# Altium PCB Ender-3.PcbDoc (part 8 of 14)
Units mil, origin at the board's own origin, x right, y up, seen from the top; angles counter-clockwise.
Board outline 3970.48 x 2769.68 mil, 2 copper layers (TopLayer, BottomLayer); 146 components, 136 nets, 669 pads, 614 vias.
Unrouted connection lines stored in the file: 1.
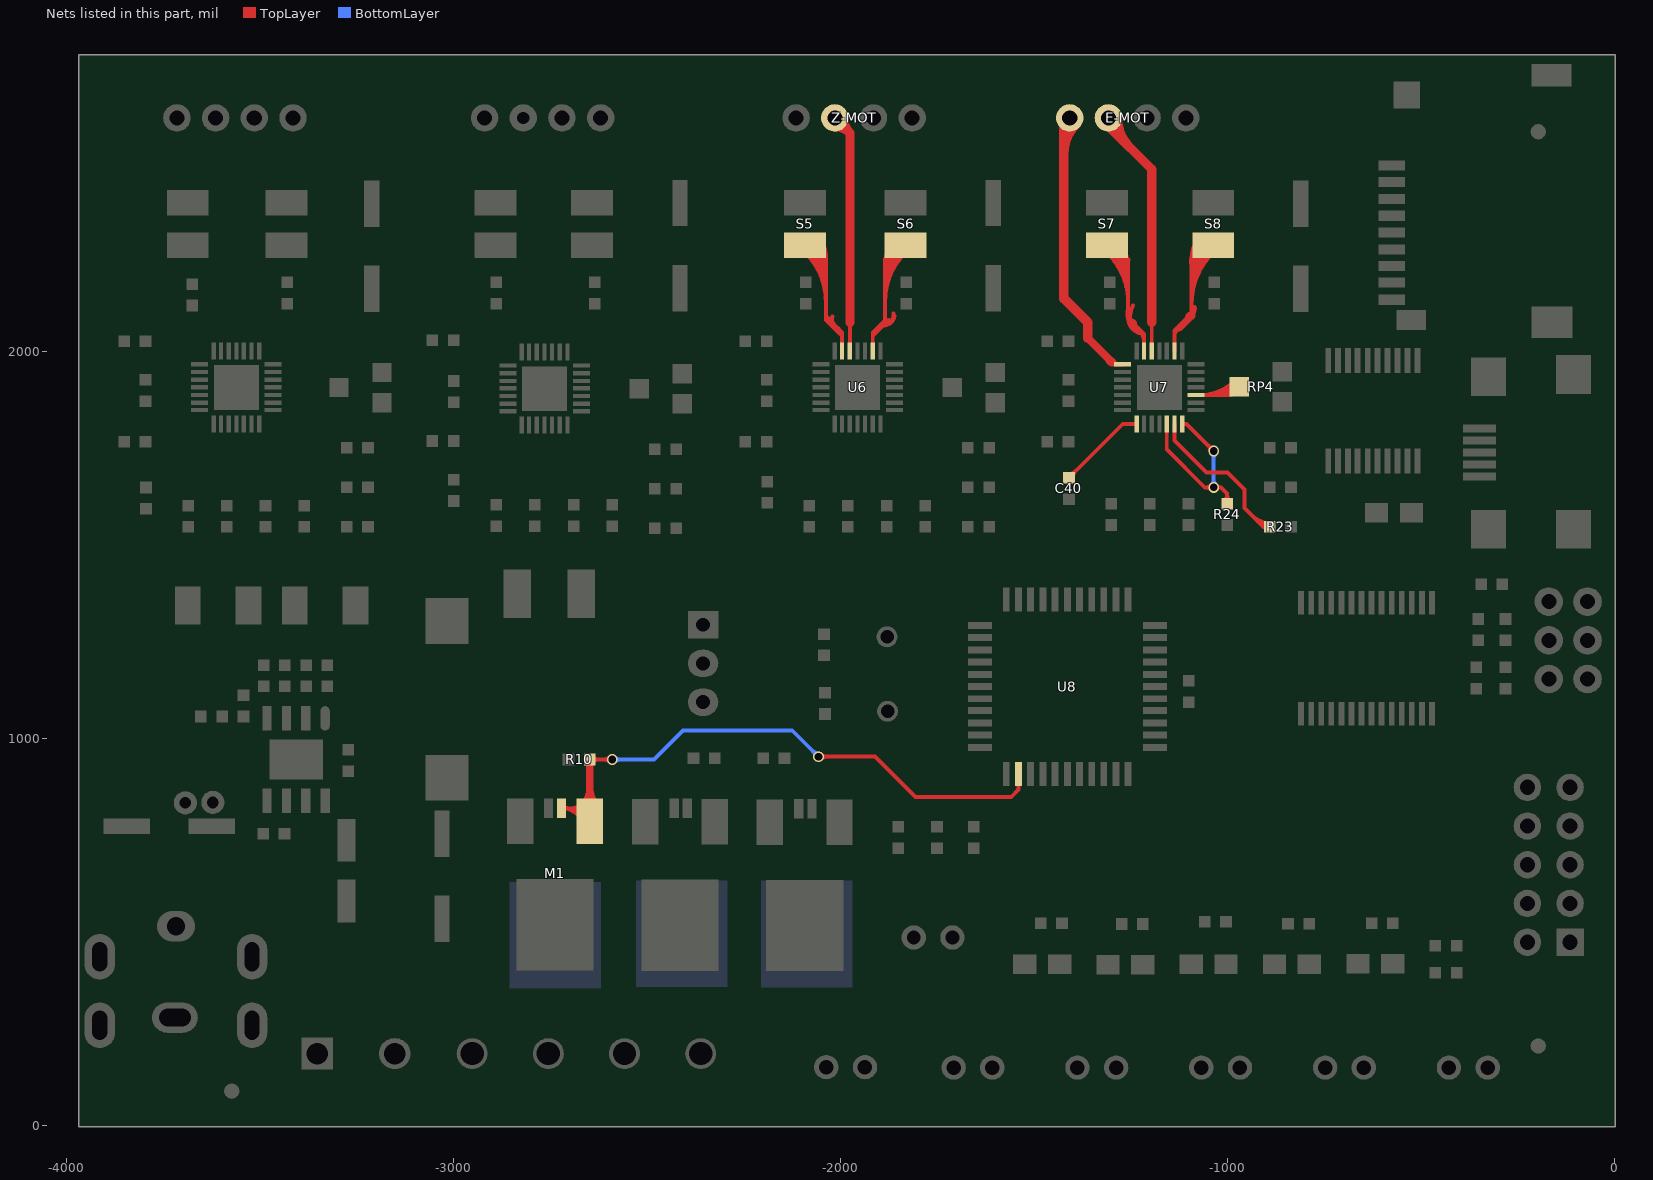
[diagram p8: the nets of this part, all layers, seen from the top]

## Via types
v1: diameter 28, hole 18, TopLayer to BottomLayer, tented both sides, 246 vias
v2: diameter 27.56, hole 19.68, TopLayer to BottomLayer, tented both sides, 196 vias
v3: diameter 20, hole 12, TopLayer to BottomLayer, tented both sides, 124 vias
v4: diameter 27.56, hole 11.81, TopLayer to BottomLayer, tented bottom, 16 vias
v5: diameter 27.56, hole 19.68, TopLayer to BottomLayer, 16 vias
v6: diameter 20, hole 12, TopLayer to BottomLayer, 12 vias
v7: diameter 28, hole 11.81, TopLayer to BottomLayer, tented both sides, 4 vias

## Nets (pads, with @x,y where several pads share a name; then routed paths per layer and width w, separated by ;. In a path a pad name is that pad's centre, name@x,y a point inside that pad or via, vN(x,y) a via of type N, cw(c..) or ccw(c..) an arc to the next point about the centre after c; other vN are vias at no path point) (continued)
NetU6_23: S6.1 U6.23 | length 5462.5
  TopLayer w10: U6.23@-1916.62,2002.88 -1916.62,2048.76 -1884.54,2080.84 -1884.54,2240.84 -1849.54,2275.84 S6.1@-1831.54,2275.84 ; -1913.54,2044.84 -1875.54,2082.84 ; -1896.41,2068.97 ccw(c-1889.91,2099.34) -1859.54,2092.84 ; -1889.47,2068.91 ccw(c-1891.47,2097.84) -1862.54,2099.84 ; -1884.54,2130.99 cw(c-1707.68,2130.99) S6.1@-1832.74,2256.04 ; -1884.54,2130.99 cw(c-1707.68,2130.99) S6.1@-1832.74,2256.04 ; -1884.54,2130.99 cw(c-1707.68,2130.99) S6.1@-1832.74,2256.04 ; -1884.54,2130.99 cw(c-1707.68,2130.99) S6.1@-1832.74,2256.04 ; -1884.54,2130.99 cw(c-1707.68,2130.99) S6.1@-1832.74,2256.04 ; -1884.54,2130.99 cw(c-1707.68,2130.99) S6.1@-1832.74,2256.04 ; -1884.54,2130.99 cw(c-1707.68,2130.99) S6.1@-1832.74,2256.04 ; -1884.54,2130.99 cw(c-1707.68,2130.99) S6.1@-1832.74,2256.04 ; -1884.54,2130.99 cw(c-1707.68,2130.99) S6.1@-1832.74,2256.04 ; -1884.54,2155.13 cw(c-1731.82,2155.13) S6.1@-1839.81,2263.11 ; -1884.54,2155.13 cw(c-1731.82,2155.13) S6.1@-1839.81,2263.11 ; -1884.54,2155.13 cw(c-1731.82,2155.13) S6.1@-1839.81,2263.11 ; -1884.54,2155.13 cw(c-1731.82,2155.13) S6.1@-1839.81,2263.11 ; -1884.54,2155.13 cw(c-1731.82,2155.13) S6.1@-1839.81,2263.11 ; -1884.54,2155.13 cw(c-1731.82,2155.13) S6.1@-1839.81,2263.11 ; -1884.54,2155.13 cw(c-1731.82,2155.13) S6.1@-1839.81,2263.11 ; -1884.54,2155.13 cw(c-1731.82,2155.13) S6.1@-1839.81,2263.11 ; -1884.54,2155.13 cw(c-1731.82,2155.13) S6.1@-1839.81,2263.11 ; -1884.54,2179.27 cw(c-1755.97,2179.27) S6.1@-1846.88,2270.19 ; -1884.54,2179.27 cw(c-1755.97,2179.27) S6.1@-1846.88,2270.19 ; -1884.54,2179.27 cw(c-1755.97,2179.27) S6.1@-1846.88,2270.19 ; -1884.54,2179.27 cw(c-1755.97,2179.27) S6.1@-1846.88,2270.19 ; -1884.54,2179.27 cw(c-1755.97,2179.27) S6.1@-1846.88,2270.19 ; -1884.54,2179.27 cw(c-1755.97,2179.27) S6.1@-1846.88,2270.19 ; -1884.54,2179.27 cw(c-1755.97,2179.27) S6.1@-1846.88,2270.19 ; -1884.54,2179.27 cw(c-1755.97,2179.27) S6.1@-1846.88,2270.19 ; -1884.54,2179.27 cw(c-1755.97,2179.27) S6.1@-1846.88,2270.19 ; -1884.54,2203.42 cw(c-1780.11,2203.42) S6.1@-1853.95,2277.26 ; -1884.54,2203.42 cw(c-1780.11,2203.42) S6.1@-1853.95,2277.26 ; -1884.54,2203.42 cw(c-1780.11,2203.42) S6.1@-1853.95,2277.26 ; -1884.54,2203.42 cw(c-1780.11,2203.42) S6.1@-1853.95,2277.26 ; -1884.54,2203.42 cw(c-1780.11,2203.42) S6.1@-1853.95,2277.26 ; -1884.54,2203.42 cw(c-1780.11,2203.42) S6.1@-1853.95,2277.26 ; -1884.54,2203.42 cw(c-1780.11,2203.42) S6.1@-1853.95,2277.26 ; -1884.54,2203.42 cw(c-1780.11,2203.42) S6.1@-1853.95,2277.26 ; -1884.54,2203.42 cw(c-1780.11,2203.42) S6.1@-1853.95,2277.26 ; -1884.54,2227.56 cw(c-1804.25,2227.56) S6.1@-1861.02,2284.33 ; -1884.54,2227.56 cw(c-1804.25,2227.56) S6.1@-1861.02,2284.33 ; -1884.54,2227.56 cw(c-1804.25,2227.56) S6.1@-1861.02,2284.33 ; -1884.54,2227.56 cw(c-1804.25,2227.56) S6.1@-1861.02,2284.33 ; -1884.54,2227.56 cw(c-1804.25,2227.56) S6.1@-1861.02,2284.33 ; -1884.54,2227.56 cw(c-1804.25,2227.56) S6.1@-1861.02,2284.33 ; -1884.54,2227.56 cw(c-1804.25,2227.56) S6.1@-1861.02,2284.33 ; -1884.54,2227.56 cw(c-1804.25,2227.56) S6.1@-1861.02,2284.33 ; -1884.54,2227.56 cw(c-1804.25,2227.56) S6.1@-1861.02,2284.33 ; -1883.03,2242.34 cw(c-1865.71,2225.02) S6.1@-1859.56,2248.74 ; -1883.03,2242.34 ccw(c-1897.92,2257.23) S6.1@-1878.44,2265.22 ; -1883.03,2242.34 cw(c-1865.71,2225.02) S6.1@-1859.56,2248.74 ; -1883.03,2242.34 ccw(c-1897.92,2257.23) S6.1@-1878.44,2265.22 ; -1883.03,2242.34 cw(c-1865.71,2225.02) S6.1@-1859.56,2248.74 ; -1883.03,2242.34 ccw(c-1897.92,2257.23) S6.1@-1878.44,2265.22 ; -1883.03,2242.34 cw(c-1865.71,2225.02) S6.1@-1859.56,2248.74 ; -1883.03,2242.34 ccw(c-1897.92,2257.23) S6.1@-1878.44,2265.22 ; -1883.03,2242.34 cw(c-1865.71,2225.02) S6.1@-1859.56,2248.74 ; -1883.03,2242.34 ccw(c-1897.92,2257.23) S6.1@-1878.44,2265.22 ; -1883.03,2242.34 ccw(c-1897.92,2257.23) S6.1@-1878.44,2265.22 ; -1883.03,2242.34 cw(c-1865.71,2225.02) S6.1@-1859.56,2248.74 ; -1883.03,2242.34 ccw(c-1897.92,2257.23) S6.1@-1878.44,2265.22 ; -1883.03,2242.34 cw(c-1865.71,2225.02) S6.1@-1859.56,2248.74 ; -1883.03,2242.34 ccw(c-1897.92,2257.23) S6.1@-1878.44,2265.22 ; -1883.03,2242.34 cw(c-1865.71,2225.02) S6.1@-1859.56,2248.74 ; -1883.03,2242.34 ccw(c-1897.92,2257.23) S6.1@-1878.44,2265.22 ; -1883.03,2242.34 cw(c-1865.71,2225.02) S6.1@-1859.56,2248.74
NetU6_26: U6.26 Z-MOT.2 | length 1112
  TopLayer w10: U6.26@-1975.62,2017.79 -1975.62,2075.84
  TopLayer w23.62: Z-MOT.2@-2014.54,2604.84 -1975.62,2565.93 ; -1975.62,2075.84 -1975.62,2565.93 ; Z-MOT.2@-2013.93,2581.23 cw(c-2012.59,2528.96) -1975.62,2565.93 ; Z-MOT.2@-2013.93,2581.23 cw(c-2012.59,2528.96) -1975.62,2565.93 ; Z-MOT.2@-2013.93,2581.23 cw(c-2012.59,2528.96) -1975.62,2565.93 ; Z-MOT.2@-2013.93,2581.23 cw(c-2012.59,2528.96) -1975.62,2565.93 ; Z-MOT.2@-2013.93,2581.23 cw(c-2012.59,2528.96) -1975.62,2565.93 ; Z-MOT.2@-2013.93,2581.23 cw(c-2012.59,2528.96) -1975.62,2565.93 ; Z-MOT.2@-1990.92,2604.24 ccw(c-1938.65,2602.9) -1975.62,2565.93 ; Z-MOT.2@-1990.92,2604.24 ccw(c-1938.65,2602.9) -1975.62,2565.93 ; Z-MOT.2@-1990.92,2604.24 ccw(c-1938.65,2602.9) -1975.62,2565.93 ; Z-MOT.2@-1990.92,2604.24 ccw(c-1938.65,2602.9) -1975.62,2565.93 ; Z-MOT.2@-1990.92,2604.24 ccw(c-1938.65,2602.9) -1975.62,2565.93 ; Z-MOT.2@-1990.92,2604.24 ccw(c-1938.65,2602.9) -1975.62,2565.93
NetU6_27: S5.1 U6.27 | length 5522.6
  TopLayer w10: S5.1@-2091.54,2275.84 -2068.54,2275.84 -2037.54,2244.84 -2037.54,2082.84 -2002.54,2047.84 cw(c-2003.58,2039.89) -1995.62,2038.84 ; -2037.54,2092.84 -1995.62,2050.93 U6.27@-1995.62,2002.88 ; -2020.54,2091.84 ccw(c-1997.24,2083.84) -2005.24,2060.55 ; S5.1@-2090.33,2256.04 cw(c-2217.8,2128.58) -2037.54,2128.58 ; S5.1@-2090.33,2256.04 cw(c-2217.8,2128.58) -2037.54,2128.58 ; S5.1@-2090.33,2256.04 cw(c-2217.8,2128.58) -2037.54,2128.58 ; S5.1@-2090.33,2256.04 cw(c-2217.8,2128.58) -2037.54,2128.58 ; S5.1@-2090.33,2256.04 cw(c-2217.8,2128.58) -2037.54,2128.58 ; S5.1@-2090.33,2256.04 cw(c-2217.8,2128.58) -2037.54,2128.58 ; S5.1@-2090.33,2256.04 cw(c-2217.8,2128.58) -2037.54,2128.58 ; S5.1@-2090.33,2256.04 cw(c-2217.8,2128.58) -2037.54,2128.58 ; S5.1@-2090.33,2256.04 cw(c-2217.8,2128.58) -2037.54,2128.58 ; S5.1@-2083.26,2263.11 cw(c-2193.66,2152.72) -2037.54,2152.72 ; S5.1@-2083.26,2263.11 cw(c-2193.66,2152.72) -2037.54,2152.72 ; S5.1@-2083.26,2263.11 cw(c-2193.66,2152.72) -2037.54,2152.72 ; S5.1@-2083.26,2263.11 cw(c-2193.66,2152.72) -2037.54,2152.72 ; S5.1@-2083.26,2263.11 cw(c-2193.66,2152.72) -2037.54,2152.72 ; S5.1@-2083.26,2263.11 cw(c-2193.66,2152.72) -2037.54,2152.72 ; S5.1@-2083.26,2263.11 cw(c-2193.66,2152.72) -2037.54,2152.72 ; S5.1@-2083.26,2263.11 cw(c-2193.66,2152.72) -2037.54,2152.72 ; S5.1@-2083.26,2263.11 cw(c-2193.66,2152.72) -2037.54,2152.72 ; S5.1@-2076.19,2270.19 cw(c-2169.52,2176.86) -2037.54,2176.86 ; S5.1@-2076.19,2270.19 cw(c-2169.52,2176.86) -2037.54,2176.86 ; S5.1@-2076.19,2270.19 cw(c-2169.52,2176.86) -2037.54,2176.86 ; S5.1@-2076.19,2270.19 cw(c-2169.52,2176.86) -2037.54,2176.86 ; S5.1@-2076.19,2270.19 cw(c-2169.52,2176.86) -2037.54,2176.86 ; S5.1@-2076.19,2270.19 cw(c-2169.52,2176.86) -2037.54,2176.86 ; S5.1@-2076.19,2270.19 cw(c-2169.52,2176.86) -2037.54,2176.86 ; S5.1@-2076.19,2270.19 cw(c-2169.52,2176.86) -2037.54,2176.86 ; S5.1@-2076.19,2270.19 cw(c-2169.52,2176.86) -2037.54,2176.86 ; S5.1@-2069.12,2277.26 cw(c-2145.38,2201) -2037.54,2201 ; S5.1@-2069.12,2277.26 cw(c-2145.38,2201) -2037.54,2201 ; S5.1@-2069.12,2277.26 cw(c-2145.38,2201) -2037.54,2201 ; S5.1@-2069.12,2277.26 cw(c-2145.38,2201) -2037.54,2201 ; S5.1@-2069.12,2277.26 cw(c-2145.38,2201) -2037.54,2201 ; S5.1@-2069.12,2277.26 cw(c-2145.38,2201) -2037.54,2201 ; S5.1@-2069.12,2277.26 cw(c-2145.38,2201) -2037.54,2201 ; S5.1@-2069.12,2277.26 cw(c-2145.38,2201) -2037.54,2201 ; S5.1@-2069.12,2277.26 cw(c-2145.38,2201) -2037.54,2201 ; S5.1@-2062.05,2284.33 cw(c-2121.23,2225.14) -2037.54,2225.14 ; S5.1@-2062.05,2284.33 cw(c-2121.23,2225.14) -2037.54,2225.14 ; S5.1@-2062.05,2284.33 cw(c-2121.23,2225.14) -2037.54,2225.14 ; S5.1@-2062.05,2284.33 cw(c-2121.23,2225.14) -2037.54,2225.14 ; S5.1@-2062.05,2284.33 cw(c-2121.23,2225.14) -2037.54,2225.14 ; S5.1@-2062.05,2284.33 cw(c-2121.23,2225.14) -2037.54,2225.14 ; S5.1@-2062.05,2284.33 cw(c-2121.23,2225.14) -2037.54,2225.14 ; S5.1@-2062.05,2284.33 cw(c-2121.23,2225.14) -2037.54,2225.14 ; S5.1@-2062.05,2284.33 cw(c-2121.23,2225.14) -2037.54,2225.14 ; S5.1@-2054.98,2291.4 cw(c-2097.09,2249.29) -2037.54,2249.29 ; S5.1@-2054.98,2291.4 cw(c-2097.09,2249.29) -2037.54,2249.29 ; S5.1@-2054.98,2291.4 cw(c-2097.09,2249.29) -2037.54,2249.29 ; S5.1@-2054.98,2291.4 cw(c-2097.09,2249.29) -2037.54,2249.29 ; S5.1@-2054.98,2291.4 cw(c-2097.09,2249.29) -2037.54,2249.29 ; S5.1@-2054.98,2291.4 cw(c-2097.09,2249.29) -2037.54,2249.29 ; S5.1@-2054.98,2291.4 cw(c-2097.09,2249.29) -2037.54,2249.29 ; S5.1@-2054.98,2291.4 cw(c-2097.09,2249.29) -2037.54,2249.29 ; S5.1@-2054.98,2291.4 cw(c-2097.09,2249.29) -2037.54,2249.29
NetU7_1: E-MOT.1 U7.1 | length 1180.2
  TopLayer w10: E-MOT.1@-1422.54,2589.8 E-MOT.1@-1407.49,2604.84 ; -1310.54,1983.84 ccw(c-1297.05,1981.36) -1299.54,1967.88 U7.1@-1270.62,1967.88 ; -1309.11,1984.42 cw(c-1308.1,1966.86) U7.1@-1290.54,1967.88
  TopLayer w20: -1360.54,2035.84 -1302.54,1977.84
  TopLayer w25: E-MOT.1@-1422.54,2589.8 -1422.54,2440.84 -1422.54,2137.8 -1360.54,2075.8 -1360.54,2035.84 ; -1422.54,2513.15 cw(c-1315.8,2513.15) E-MOT.1@-1391.27,2588.63 ; -1422.54,2513.15 cw(c-1315.8,2513.15) E-MOT.1@-1391.27,2588.63 ; -1422.54,2513.15 cw(c-1315.8,2513.15) E-MOT.1@-1391.27,2588.63 ; -1422.54,2513.15 cw(c-1315.8,2513.15) E-MOT.1@-1391.27,2588.63 ; -1422.54,2513.15 cw(c-1315.8,2513.15) E-MOT.1@-1391.27,2588.63
NetU7_8: C40.1 U7.8 | length 572.2
  TopLayer w10: C40.1@-1409.45,1674.8 -1270.37,1813.88 U7.8@-1236.12,1813.88 ; C40.1@-1409.45,1684.8 ccw(c-1409.45,1708.95) -1392.38,1691.87 ; C40.1@-1409.45,1684.8 ccw(c-1409.45,1708.95) -1392.38,1691.87 ; C40.1@-1409.45,1684.8 ccw(c-1409.45,1708.95) -1392.38,1691.87 ; C40.1@-1409.45,1684.8 ccw(c-1409.45,1708.95) -1392.38,1691.87 ; C40.1@-1409.45,1684.8 ccw(c-1409.45,1708.95) -1392.38,1691.87 ; C40.1@-1409.45,1684.8 ccw(c-1409.45,1708.95) -1392.38,1691.87 ; C40.1@-1409.45,1684.8 ccw(c-1409.45,1708.95) -1392.38,1691.87 ; C40.1@-1409.45,1684.8 ccw(c-1409.45,1708.95) -1392.38,1691.87 ; C40.1@-1409.45,1684.8 ccw(c-1409.45,1708.95) -1392.38,1691.87 ; C40.1@-1399.45,1674.8 cw(c-1375.31,1674.8) -1392.38,1691.87 ; C40.1@-1399.45,1674.8 cw(c-1375.31,1674.8) -1392.38,1691.87 ; C40.1@-1399.45,1674.8 cw(c-1375.31,1674.8) -1392.38,1691.87 ; C40.1@-1399.45,1674.8 cw(c-1375.31,1674.8) -1392.38,1691.87 ; C40.1@-1399.45,1674.8 cw(c-1375.31,1674.8) -1392.38,1691.87 ; C40.1@-1399.45,1674.8 cw(c-1375.31,1674.8) -1392.38,1691.87 ; C40.1@-1399.45,1674.8 cw(c-1375.31,1674.8) -1392.38,1691.87 ; C40.1@-1399.45,1674.8 cw(c-1375.31,1674.8) -1392.38,1691.87 ; C40.1@-1399.45,1674.8 cw(c-1375.31,1674.8) -1392.38,1691.87
NetU7_12: R24.1 U7.12 U7.14 | length 2290.6
  TopLayer w10: U7.12@-1156.62,1813.88 -1156.62,1747.93 -1058.54,1649.84 -1016.54,1649.84 ; U7.14@-1116.12,1813.88 -1105.57,1813.88 v2(-1035.54,1743.84) ; R24.1@-1000.62,1607.88 -1000.62,1633.93 -1016.54,1649.84 ; -1056.73,1649.84 cw(c-1056.73,1628.65) v2@-1041.74,1643.63 ; -1056.73,1649.84 ccw(c-1056.73,1671.04) v2@-1041.74,1656.05 ; -1056.73,1649.84 cw(c-1056.73,1628.65) v2@-1041.74,1643.63 ; -1056.73,1649.84 ccw(c-1056.73,1671.04) v2@-1041.74,1656.05 ; -1056.73,1649.84 cw(c-1056.73,1628.65) v2@-1041.74,1643.63 ; -1056.73,1649.84 ccw(c-1056.73,1671.04) v2@-1041.74,1656.05 ; -1056.73,1649.84 cw(c-1056.73,1628.65) v2@-1041.74,1643.63 ; -1056.73,1649.84 ccw(c-1056.73,1671.04) v2@-1041.74,1656.05 ; -1056.73,1649.84 cw(c-1056.73,1628.65) v2@-1041.74,1643.63 ; -1056.73,1649.84 ccw(c-1056.73,1671.04) v2@-1041.74,1656.05 ; -1056.73,1649.84 ccw(c-1056.73,1671.04) v2@-1041.74,1656.05 ; -1056.73,1649.84 cw(c-1056.73,1628.65) v2@-1041.74,1643.63 ; -1056.73,1649.84 ccw(c-1056.73,1671.04) v2@-1041.74,1656.05 ; -1056.73,1649.84 cw(c-1056.73,1628.65) v2@-1041.74,1643.63 ; -1056.73,1649.84 ccw(c-1056.73,1671.04) v2@-1041.74,1656.05 ; -1056.73,1649.84 cw(c-1056.73,1628.65) v2@-1041.74,1643.63 ; -1056.73,1649.84 ccw(c-1056.73,1671.04) v2@-1041.74,1656.05 ; -1056.73,1649.84 cw(c-1056.73,1628.65) v2@-1041.74,1643.63 ; -1050.52,1758.83 cw(c-1065.51,1743.84) v2@-1044.31,1743.84 ; -1050.52,1758.83 ccw(c-1035.54,1773.82) v2@-1035.54,1752.62 ; -1050.52,1758.83 cw(c-1065.51,1743.84) v2@-1044.31,1743.84 ; -1050.52,1758.83 ccw(c-1035.54,1773.82) v2@-1035.54,1752.62 ; -1050.52,1758.83 cw(c-1065.51,1743.84) v2@-1044.31,1743.84 ; -1050.52,1758.83 ccw(c-1035.54,1773.82) v2@-1035.54,1752.62 ; -1050.52,1758.83 cw(c-1065.51,1743.84) v2@-1044.31,1743.84 ; -1050.52,1758.83 ccw(c-1035.54,1773.82) v2@-1035.54,1752.62 ; -1050.52,1758.83 cw(c-1065.51,1743.84) v2@-1044.31,1743.84 ; -1050.52,1758.83 ccw(c-1035.54,1773.82) v2@-1035.54,1752.62 ; -1050.52,1758.83 ccw(c-1035.54,1773.82) v2@-1035.54,1752.62 ; -1050.52,1758.83 cw(c-1065.51,1743.84) v2@-1044.31,1743.84 ; -1050.52,1758.83 ccw(c-1035.54,1773.82) v2@-1035.54,1752.62 ; -1050.52,1758.83 cw(c-1065.51,1743.84) v2@-1044.31,1743.84 ; -1050.52,1758.83 ccw(c-1035.54,1773.82) v2@-1035.54,1752.62 ; -1050.52,1758.83 cw(c-1065.51,1743.84) v2@-1044.31,1743.84 ; -1050.52,1758.83 ccw(c-1035.54,1773.82) v2@-1035.54,1752.62 ; -1050.52,1758.83 cw(c-1065.51,1743.84) v2@-1044.31,1743.84 ; v2@-1028.85,1644.15 cw(c-1016.54,1633.68) -1016.54,1649.84 ; v2@-1028.85,1644.15 cw(c-1016.54,1633.68) -1016.54,1649.84 ; v2@-1028.85,1644.15 cw(c-1016.54,1633.68) -1016.54,1649.84 ; v2@-1028.85,1644.15 cw(c-1016.54,1633.68) -1016.54,1649.84 ; v2@-1028.85,1644.15 cw(c-1016.54,1633.68) -1016.54,1649.84 ; v2@-1028.85,1644.15 cw(c-1016.54,1633.68) -1016.54,1649.84 ; v2@-1028.85,1644.15 cw(c-1016.54,1633.68) -1016.54,1649.84 ; v2@-1028.85,1644.15 cw(c-1016.54,1633.68) -1016.54,1649.84 ; v2@-1028.85,1644.15 cw(c-1016.54,1633.68) -1016.54,1649.84 ; v2@-1028.85,1655.53 ccw(c-1016.54,1666.01) -1016.54,1649.84 ; v2@-1028.85,1655.53 ccw(c-1016.54,1666.01) -1016.54,1649.84 ; v2@-1028.85,1655.53 ccw(c-1016.54,1666.01) -1016.54,1649.84 ; v2@-1028.85,1655.53 ccw(c-1016.54,1666.01) -1016.54,1649.84 ; v2@-1028.85,1655.53 ccw(c-1016.54,1666.01) -1016.54,1649.84 ; v2@-1028.85,1655.53 ccw(c-1016.54,1666.01) -1016.54,1649.84 ; v2@-1028.85,1655.53 ccw(c-1016.54,1666.01) -1016.54,1649.84 ; v2@-1028.85,1655.53 ccw(c-1016.54,1666.01) -1016.54,1649.84 ; v2@-1028.85,1655.53 ccw(c-1016.54,1666.01) -1016.54,1649.84 ; R24.1@-1007.69,1614.95 ccw(c-1024.76,1632.02) -1000.62,1632.02 ; R24.1@-1007.69,1614.95 ccw(c-1024.76,1632.02) -1000.62,1632.02 ; R24.1@-1007.69,1614.95 ccw(c-1024.76,1632.02) -1000.62,1632.02 ; R24.1@-1007.69,1614.95 ccw(c-1024.76,1632.02) -1000.62,1632.02 ; R24.1@-1007.69,1614.95 ccw(c-1024.76,1632.02) -1000.62,1632.02 ; R24.1@-1007.69,1614.95 ccw(c-1024.76,1632.02) -1000.62,1632.02 ; R24.1@-1007.69,1614.95 ccw(c-1024.76,1632.02) -1000.62,1632.02 ; R24.1@-1007.69,1614.95 ccw(c-1024.76,1632.02) -1000.62,1632.02 ; R24.1@-1007.69,1614.95 ccw(c-1024.76,1632.02) -1000.62,1632.02 ; -1000.62,1632.02 ccw(c-976.48,1632.02) R24.1@-993.55,1614.95 ; -1000.62,1632.02 ccw(c-976.48,1632.02) R24.1@-993.55,1614.95 ; -1000.62,1632.02 ccw(c-976.48,1632.02) R24.1@-993.55,1614.95 ; -1000.62,1632.02 ccw(c-976.48,1632.02) R24.1@-993.55,1614.95 ; -1000.62,1632.02 ccw(c-976.48,1632.02) R24.1@-993.55,1614.95 ; -1000.62,1632.02 ccw(c-976.48,1632.02) R24.1@-993.55,1614.95 ; -1000.62,1632.02 ccw(c-976.48,1632.02) R24.1@-993.55,1614.95 ; -1000.62,1632.02 ccw(c-976.48,1632.02) R24.1@-993.55,1614.95 ; -1000.62,1632.02 ccw(c-976.48,1632.02) R24.1@-993.55,1614.95
  BottomLayer w10: v2(-1035.54,1649.84) v2(-1035.54,1743.84) ; v2@-1041.74,1656.05 ccw(c-1056.73,1671.04) -1035.54,1671.04 ; v2@-1041.74,1656.05 ccw(c-1056.73,1671.04) -1035.54,1671.04 ; v2@-1041.74,1656.05 ccw(c-1056.73,1671.04) -1035.54,1671.04 ; v2@-1041.74,1656.05 ccw(c-1056.73,1671.04) -1035.54,1671.04 ; v2@-1041.74,1656.05 ccw(c-1056.73,1671.04) -1035.54,1671.04 ; v2@-1041.74,1656.05 ccw(c-1056.73,1671.04) -1035.54,1671.04 ; v2@-1041.74,1656.05 ccw(c-1056.73,1671.04) -1035.54,1671.04 ; v2@-1041.74,1656.05 ccw(c-1056.73,1671.04) -1035.54,1671.04 ; v2@-1041.74,1656.05 ccw(c-1056.73,1671.04) -1035.54,1671.04 ; v2@-1041.74,1737.63 cw(c-1056.73,1722.65) -1035.54,1722.65 ; v2@-1041.74,1737.63 cw(c-1056.73,1722.65) -1035.54,1722.65 ; v2@-1041.74,1737.63 cw(c-1056.73,1722.65) -1035.54,1722.65 ; v2@-1041.74,1737.63 cw(c-1056.73,1722.65) -1035.54,1722.65 ; v2@-1041.74,1737.63 cw(c-1056.73,1722.65) -1035.54,1722.65 ; v2@-1041.74,1737.63 cw(c-1056.73,1722.65) -1035.54,1722.65 ; v2@-1041.74,1737.63 cw(c-1056.73,1722.65) -1035.54,1722.65 ; v2@-1041.74,1737.63 cw(c-1056.73,1722.65) -1035.54,1722.65 ; v2@-1041.74,1737.63 cw(c-1056.73,1722.65) -1035.54,1722.65 ; -1035.54,1671.04 ccw(c-1014.34,1671.04) v2@-1029.33,1656.05 ; -1035.54,1671.04 ccw(c-1014.34,1671.04) v2@-1029.33,1656.05 ; -1035.54,1671.04 ccw(c-1014.34,1671.04) v2@-1029.33,1656.05 ; -1035.54,1671.04 ccw(c-1014.34,1671.04) v2@-1029.33,1656.05 ; -1035.54,1671.04 ccw(c-1014.34,1671.04) v2@-1029.33,1656.05 ; -1035.54,1671.04 ccw(c-1014.34,1671.04) v2@-1029.33,1656.05 ; -1035.54,1671.04 ccw(c-1014.34,1671.04) v2@-1029.33,1656.05 ; -1035.54,1671.04 ccw(c-1014.34,1671.04) v2@-1029.33,1656.05 ; -1035.54,1671.04 ccw(c-1014.34,1671.04) v2@-1029.33,1656.05 ; -1035.54,1722.65 cw(c-1014.34,1722.65) v2@-1029.33,1737.63 ; -1035.54,1722.65 cw(c-1014.34,1722.65) v2@-1029.33,1737.63 ; -1035.54,1722.65 cw(c-1014.34,1722.65) v2@-1029.33,1737.63 ; -1035.54,1722.65 cw(c-1014.34,1722.65) v2@-1029.33,1737.63 ; -1035.54,1722.65 cw(c-1014.34,1722.65) v2@-1029.33,1737.63 ; -1035.54,1722.65 cw(c-1014.34,1722.65) v2@-1029.33,1737.63 ; -1035.54,1722.65 cw(c-1014.34,1722.65) v2@-1029.33,1737.63 ; -1035.54,1722.65 cw(c-1014.34,1722.65) v2@-1029.33,1737.63 ; -1035.54,1722.65 cw(c-1014.34,1722.65) v2@-1029.33,1737.63
NetU7_13: R23.1 U7.13 | length 1280.2
  TopLayer w10: U7.13@-1136.62,1813.88 -1136.62,1770.93 -1054.54,1688.84 -999.54,1688.84 -955.54,1644.84 -955.54,1596.84 -906.57,1547.88 ; -934.92,1576.23 ccw(c-890.62,1620.53) R23.1@-890.62,1557.88 ; -934.92,1576.23 ccw(c-890.62,1620.53) R23.1@-890.62,1557.88 ; -934.92,1576.23 ccw(c-890.62,1620.53) R23.1@-890.62,1557.88 ; -934.92,1576.23 ccw(c-890.62,1620.53) R23.1@-890.62,1557.88 ; -934.92,1576.23 ccw(c-890.62,1620.53) R23.1@-890.62,1557.88 ; -934.92,1576.23 ccw(c-890.62,1620.53) R23.1@-890.62,1557.88 ; -934.92,1576.23 ccw(c-890.62,1620.53) R23.1@-890.62,1557.88 ; -934.92,1576.23 ccw(c-890.62,1620.53) R23.1@-890.62,1557.88 ; -934.92,1576.23 ccw(c-890.62,1620.53) R23.1@-890.62,1557.88 ; -917.85,1559.16 ccw(c-890.62,1586.39) R23.1@-890.62,1547.88 ; -917.85,1559.16 ccw(c-890.62,1586.39) R23.1@-890.62,1547.88 ; -917.85,1559.16 ccw(c-890.62,1586.39) R23.1@-890.62,1547.88 ; -917.85,1559.16 ccw(c-890.62,1586.39) R23.1@-890.62,1547.88 ; -917.85,1559.16 ccw(c-890.62,1586.39) R23.1@-890.62,1547.88 ; -917.85,1559.16 ccw(c-890.62,1586.39) R23.1@-890.62,1547.88 ; -917.85,1559.16 ccw(c-890.62,1586.39) R23.1@-890.62,1547.88 ; -917.85,1559.16 ccw(c-890.62,1586.39) R23.1@-890.62,1547.88 ; -917.85,1559.16 ccw(c-890.62,1586.39) R23.1@-890.62,1547.88 ; -906.57,1547.88 cw(c-906.57,1540.16) R23.1@-899.62,1543.52 ; -906.57,1547.88 ccw(c-906.57,1555.6) R23.1@-899.62,1552.24 ; -906.57,1547.88 cw(c-906.57,1540.16) R23.1@-899.62,1543.52 ; -906.57,1547.88 ccw(c-906.57,1555.6) R23.1@-899.62,1552.24 ; -906.57,1547.88 cw(c-906.57,1540.16) R23.1@-899.62,1543.52 ; -906.57,1547.88 ccw(c-906.57,1555.6) R23.1@-899.62,1552.24 ; -906.57,1547.88 cw(c-906.57,1540.16) R23.1@-899.62,1543.52 ; -906.57,1547.88 ccw(c-906.57,1555.6) R23.1@-899.62,1552.24 ; -906.57,1547.88 cw(c-906.57,1540.16) R23.1@-899.62,1543.52 ; -906.57,1547.88 ccw(c-906.57,1555.6) R23.1@-899.62,1552.24 ; -906.57,1547.88 ccw(c-906.57,1555.6) R23.1@-899.62,1552.24 ; -906.57,1547.88 cw(c-906.57,1540.16) R23.1@-899.62,1543.52 ; -906.57,1547.88 ccw(c-906.57,1555.6) R23.1@-899.62,1552.24 ; -906.57,1547.88 cw(c-906.57,1540.16) R23.1@-899.62,1543.52 ; -906.57,1547.88 ccw(c-906.57,1555.6) R23.1@-899.62,1552.24 ; -906.57,1547.88 cw(c-906.57,1540.16) R23.1@-899.62,1543.52 ; -906.57,1547.88 ccw(c-906.57,1555.6) R23.1@-899.62,1552.24 ; -906.57,1547.88 cw(c-906.57,1540.16) R23.1@-899.62,1543.52 ; -906.57,1547.88 R23.1@-890.62,1547.88
NetU7_17: RP4.1 U7.17 | length 1170.8
  TopLayer w10: U7.17@-1080.62,1888.88 -990.5,1888.88 RP4.1@-969.54,1909.84 ; U7.17@-1068.42,1888.88 ccw(c-1068.42,2008.73) RP4.1@-983.68,1923.98 ; U7.17@-1068.42,1888.88 ccw(c-1068.42,2008.73) RP4.1@-983.68,1923.98 ; U7.17@-1068.42,1888.88 ccw(c-1068.42,2008.73) RP4.1@-983.68,1923.98 ; U7.17@-1068.42,1888.88 ccw(c-1068.42,2008.73) RP4.1@-983.68,1923.98 ; -1044.28,1888.88 ccw(c-1044.28,1984.59) RP4.1@-976.61,1916.91 ; -1044.28,1888.88 ccw(c-1044.28,1984.59) RP4.1@-976.61,1916.91 ; -1044.28,1888.88 ccw(c-1044.28,1984.59) RP4.1@-976.61,1916.91 ; -1044.28,1888.88 ccw(c-1044.28,1984.59) RP4.1@-976.61,1916.91 ; -1020.14,1888.88 ccw(c-1020.14,1960.45) RP4.1@-969.54,1909.84 ; -1020.14,1888.88 ccw(c-1020.14,1960.45) RP4.1@-969.54,1909.84 ; -1020.14,1888.88 ccw(c-1020.14,1960.45) RP4.1@-969.54,1909.84 ; -1020.14,1888.88 ccw(c-1020.14,1960.45) RP4.1@-969.54,1909.84 ; -996,1888.88 ccw(c-996,1936.31) RP4.1@-962.46,1902.77 ; -996,1888.88 ccw(c-996,1936.31) RP4.1@-962.46,1902.77 ; -996,1888.88 ccw(c-996,1936.31) RP4.1@-962.46,1902.77 ; -996,1888.88 ccw(c-996,1936.31) RP4.1@-962.46,1902.77
NetU7_23: S8.1 U7.23 | length 6559.1
  TopLayer w10: U7.23@-1136.62,2002.88 -1136.62,2055.76 -1105.29,2087.08 ; -1136.62,2040.84 cw(c-1119.32,2042.3) -1120.78,2059.6 -1087.54,2092.84 cw(c-1099.29,2098.84) -1105.29,2087.08 ; -1092.54,2222.84 cw(c-1041.04,2236.34) S8.1@-1054.54,2287.84 ; -1092.54,2232.84 ccw(c-1105.04,2261.34) -1073.98,2259.4 ccw(c-1105.04,2261.34) S8.1@-1076.54,2273.84 ; -1084.54,2116.84 cw(c-1109.79,2112.34) -1105.29,2087.08 ; S8.1@-1084.54,2254.84 ccw(c-1081.54,2243.84) -1092.54,2240.84 ; S8.1@-1036.54,2275.84 -1057.54,2275.84 -1092.54,2240.84 ; -1105.29,2087.08 cw(c-1092.54,2087.08) -1092.54,2099.84 ; -1105.29,2087.08 -1092.54,2099.84 ; -1092.54,2099.84 -1092.54,2240.84 ; -1092.54,2123.75 cw(c-905.44,2123.75) S8.1@-1037.74,2256.04 ; -1092.54,2123.75 cw(c-905.44,2123.75) S8.1@-1037.74,2256.04 ; -1092.54,2123.75 cw(c-905.44,2123.75) S8.1@-1037.74,2256.04 ; -1092.54,2123.75 cw(c-905.44,2123.75) S8.1@-1037.74,2256.04 ; -1092.54,2123.75 cw(c-905.44,2123.75) S8.1@-1037.74,2256.04 ; -1092.54,2123.75 cw(c-905.44,2123.75) S8.1@-1037.74,2256.04 ; -1092.54,2123.75 cw(c-905.44,2123.75) S8.1@-1037.74,2256.04 ; -1092.54,2123.75 cw(c-905.44,2123.75) S8.1@-1037.74,2256.04 ; -1092.54,2123.75 cw(c-905.44,2123.75) S8.1@-1037.74,2256.04 ; -1092.54,2147.89 cw(c-929.58,2147.89) S8.1@-1044.81,2263.11 ; -1092.54,2147.89 cw(c-929.58,2147.89) S8.1@-1044.81,2263.11 ; -1092.54,2147.89 cw(c-929.58,2147.89) S8.1@-1044.81,2263.11 ; -1092.54,2147.89 cw(c-929.58,2147.89) S8.1@-1044.81,2263.11 ; -1092.54,2147.89 cw(c-929.58,2147.89) S8.1@-1044.81,2263.11 ; -1092.54,2147.89 cw(c-929.58,2147.89) S8.1@-1044.81,2263.11 ; -1092.54,2147.89 cw(c-929.58,2147.89) S8.1@-1044.81,2263.11 ; -1092.54,2147.89 cw(c-929.58,2147.89) S8.1@-1044.81,2263.11 ; -1092.54,2147.89 cw(c-929.58,2147.89) S8.1@-1044.81,2263.11 ; -1092.54,2172.03 cw(c-953.72,2172.03) S8.1@-1051.88,2270.19 ; -1092.54,2172.03 cw(c-953.72,2172.03) S8.1@-1051.88,2270.19 ; -1092.54,2172.03 cw(c-953.72,2172.03) S8.1@-1051.88,2270.19 ; -1092.54,2172.03 cw(c-953.72,2172.03) S8.1@-1051.88,2270.19 ; -1092.54,2172.03 cw(c-953.72,2172.03) S8.1@-1051.88,2270.19 ; -1092.54,2172.03 cw(c-953.72,2172.03) S8.1@-1051.88,2270.19 ; -1092.54,2172.03 cw(c-953.72,2172.03) S8.1@-1051.88,2270.19 ; -1092.54,2172.03 cw(c-953.72,2172.03) S8.1@-1051.88,2270.19 ; -1092.54,2172.03 cw(c-953.72,2172.03) S8.1@-1051.88,2270.19 ; -1092.54,2196.17 cw(c-977.87,2196.17) S8.1@-1058.95,2277.26 ; -1092.54,2196.17 cw(c-977.87,2196.17) S8.1@-1058.95,2277.26 ; -1092.54,2196.17 cw(c-977.87,2196.17) S8.1@-1058.95,2277.26 ; -1092.54,2196.17 cw(c-977.87,2196.17) S8.1@-1058.95,2277.26 ; -1092.54,2196.17 cw(c-977.87,2196.17) S8.1@-1058.95,2277.26 ; -1092.54,2196.17 cw(c-977.87,2196.17) S8.1@-1058.95,2277.26 ; -1092.54,2196.17 cw(c-977.87,2196.17) S8.1@-1058.95,2277.26 ; -1092.54,2196.17 cw(c-977.87,2196.17) S8.1@-1058.95,2277.26 ; -1092.54,2196.17 cw(c-977.87,2196.17) S8.1@-1058.95,2277.26 ; -1092.54,2220.32 cw(c-1002.01,2220.32) S8.1@-1066.02,2284.33 ; -1092.54,2220.32 cw(c-1002.01,2220.32) S8.1@-1066.02,2284.33 ; -1092.54,2220.32 cw(c-1002.01,2220.32) S8.1@-1066.02,2284.33 ; -1092.54,2220.32 cw(c-1002.01,2220.32) S8.1@-1066.02,2284.33 ; -1092.54,2220.32 cw(c-1002.01,2220.32) S8.1@-1066.02,2284.33 ; -1092.54,2220.32 cw(c-1002.01,2220.32) S8.1@-1066.02,2284.33 ; -1092.54,2220.32 cw(c-1002.01,2220.32) S8.1@-1066.02,2284.33 ; -1092.54,2220.32 cw(c-1002.01,2220.32) S8.1@-1066.02,2284.33 ; -1092.54,2220.32 cw(c-1002.01,2220.32) S8.1@-1066.02,2284.33 ; -1092.53,2240.84 cw(c-1071.5,2219.81) S8.1@-1064.31,2248.67 ; -1092.53,2240.84 ccw(c-1113.57,2261.88) S8.1@-1084.7,2269.07 ; -1092.53,2240.84 cw(c-1071.5,2219.81) S8.1@-1064.31,2248.67 ; -1092.53,2240.84 ccw(c-1113.57,2261.88) S8.1@-1084.7,2269.07 ; -1092.53,2240.84 cw(c-1071.5,2219.81) S8.1@-1064.31,2248.67 ; -1092.53,2240.84 ccw(c-1113.57,2261.88) S8.1@-1084.7,2269.07 ; -1092.53,2240.84 cw(c-1071.5,2219.81) S8.1@-1064.31,2248.67 ; -1092.53,2240.84 ccw(c-1113.57,2261.88) S8.1@-1084.7,2269.07 ; -1092.53,2240.84 cw(c-1071.5,2219.81) S8.1@-1064.31,2248.67 ; -1092.53,2240.84 ccw(c-1113.57,2261.88) S8.1@-1084.7,2269.07 ; -1092.53,2240.84 ccw(c-1113.57,2261.88) S8.1@-1084.7,2269.07 ; -1092.53,2240.84 cw(c-1071.5,2219.81) S8.1@-1064.31,2248.67 ; -1092.53,2240.84 ccw(c-1113.57,2261.88) S8.1@-1084.7,2269.07 ; -1092.53,2240.84 cw(c-1071.5,2219.81) S8.1@-1064.31,2248.67 ; -1092.53,2240.84 ccw(c-1113.57,2261.88) S8.1@-1084.7,2269.07 ; -1092.53,2240.84 cw(c-1071.5,2219.81) S8.1@-1064.31,2248.67 ; -1092.53,2240.84 ccw(c-1113.57,2261.88) S8.1@-1084.7,2269.07 ; -1092.53,2240.84 cw(c-1071.5,2219.81) S8.1@-1064.31,2248.67 ; -1092.54,2244.46 cw(c-1026.15,2244.46) S8.1@-1073.09,2291.4 ; -1092.54,2244.46 cw(c-1026.15,2244.46) S8.1@-1073.09,2291.4 ; -1092.54,2244.46 cw(c-1026.15,2244.46) S8.1@-1073.09,2291.4 ; -1092.54,2244.46 cw(c-1026.15,2244.46) S8.1@-1073.09,2291.4 ; -1092.54,2244.46 cw(c-1026.15,2244.46) S8.1@-1073.09,2291.4 ; -1092.54,2244.46 cw(c-1026.15,2244.46) S8.1@-1073.09,2291.4 ; -1092.54,2244.46 cw(c-1026.15,2244.46) S8.1@-1073.09,2291.4 ; -1092.54,2244.46 cw(c-1026.15,2244.46) S8.1@-1073.09,2291.4 ; -1092.54,2244.46 cw(c-1026.15,2244.46) S8.1@-1073.09,2291.4
NetU7_26: E-MOT.2 U7.26 | length 1271.3
  TopLayer w10: E-MOT.2@-1307.49,2583.8 E-MOT.2@-1307.49,2604.84 ; U7.26@-1195.62,2002.88 -1195.62,2076.84
  TopLayer w23.62: E-MOT.2@-1307.49,2583.8 -1195.62,2471.93 -1195.62,2433.84 -1195.62,2076.84 ; E-MOT.2@-1307.49,2604.84 ccw(c-1256.68,2604.84) -1292.61,2568.91 ; E-MOT.2@-1307.49,2604.84 ccw(c-1256.68,2604.84) -1292.61,2568.91 ; E-MOT.2@-1307.49,2604.84 ccw(c-1256.68,2604.84) -1292.61,2568.91 ; E-MOT.2@-1307.49,2604.84 ccw(c-1256.68,2604.84) -1292.61,2568.91 ; E-MOT.2@-1307.49,2604.84 ccw(c-1256.68,2604.84) -1292.61,2568.91 ; E-MOT.2@-1283.87,2604.84 ccw(c-1176.03,2604.84) -1252.28,2528.59 ; E-MOT.2@-1283.87,2604.84 ccw(c-1176.03,2604.84) -1252.28,2528.59 ; E-MOT.2@-1283.87,2604.84 ccw(c-1176.03,2604.84) -1252.28,2528.59 ; E-MOT.2@-1283.87,2604.84 ccw(c-1176.03,2604.84) -1252.28,2528.59 ; E-MOT.2@-1283.87,2604.84 ccw(c-1176.03,2604.84) -1252.28,2528.59
NetU7_27: S7.1 U7.27 | length 4566.8
  TopLayer w10: S7.1@-1311.54,2275.84 -1293.54,2275.84 -1256.54,2238.84 -1256.54,2087.84 ; S7.1@-1284.91,2248.41 cw(c-1278.97,2219.41) -1258.04,2240.34 cw(c-1240.05,2258.33) S7.1@-1264.08,2266.67 ; -1256.54,2110.84 ccw(c-1227.54,2098.84) -1239.54,2069.84 ; -1247.54,2062.84 cw(c-1253.08,2025.39) U7.27@-1215.62,2019.84 ; -1243.54,2079.84 cw(c-1246.04,2072.83) -1239.02,2070.33 ; -1243.54,2119.84 ccw(c-1204.04,2094.34) -1229.54,2054.84 ; U7.27@-1215.62,2002.88 -1215.62,2046.93 ; S7.1@-1310.33,2256.04 cw(c-1440.22,2126.16) -1256.54,2126.16 ; S7.1@-1310.33,2256.04 cw(c-1440.22,2126.16) -1256.54,2126.16 ; S7.1@-1310.33,2256.04 cw(c-1440.22,2126.16) -1256.54,2126.16 ; S7.1@-1310.33,2256.04 cw(c-1440.22,2126.16) -1256.54,2126.16 ; S7.1@-1310.33,2256.04 cw(c-1440.22,2126.16) -1256.54,2126.16 ; S7.1@-1310.33,2256.04 cw(c-1440.22,2126.16) -1256.54,2126.16 ; S7.1@-1303.26,2263.11 cw(c-1416.07,2150.3) -1256.54,2150.3 ; S7.1@-1303.26,2263.11 cw(c-1416.07,2150.3) -1256.54,2150.3 ; S7.1@-1303.26,2263.11 cw(c-1416.07,2150.3) -1256.54,2150.3 ; S7.1@-1303.26,2263.11 cw(c-1416.07,2150.3) -1256.54,2150.3 ; S7.1@-1303.26,2263.11 cw(c-1416.07,2150.3) -1256.54,2150.3 ; S7.1@-1303.26,2263.11 cw(c-1416.07,2150.3) -1256.54,2150.3 ; S7.1@-1296.19,2270.19 cw(c-1391.93,2174.45) -1256.54,2174.45 ; S7.1@-1296.19,2270.19 cw(c-1391.93,2174.45) -1256.54,2174.45 ; S7.1@-1296.19,2270.19 cw(c-1391.93,2174.45) -1256.54,2174.45 ; S7.1@-1296.19,2270.19 cw(c-1391.93,2174.45) -1256.54,2174.45 ; S7.1@-1296.19,2270.19 cw(c-1391.93,2174.45) -1256.54,2174.45 ; S7.1@-1296.19,2270.19 cw(c-1391.93,2174.45) -1256.54,2174.45 ; S7.1@-1289.12,2277.26 cw(c-1367.79,2198.59) -1256.54,2198.59 ; S7.1@-1289.12,2277.26 cw(c-1367.79,2198.59) -1256.54,2198.59 ; S7.1@-1289.12,2277.26 cw(c-1367.79,2198.59) -1256.54,2198.59 ; S7.1@-1289.12,2277.26 cw(c-1367.79,2198.59) -1256.54,2198.59 ; S7.1@-1289.12,2277.26 cw(c-1367.79,2198.59) -1256.54,2198.59 ; S7.1@-1289.12,2277.26 cw(c-1367.79,2198.59) -1256.54,2198.59 ; S7.1@-1286.82,2248.09 cw(c-1281.79,2210.59) -1255.04,2237.34 ; S7.1@-1286.82,2248.09 cw(c-1281.79,2210.59) -1255.04,2237.34 ; S7.1@-1286.82,2248.09 cw(c-1281.79,2210.59) -1255.04,2237.34 ; S7.1@-1286.82,2248.09 cw(c-1281.79,2210.59) -1255.04,2237.34 ; S7.1@-1286.82,2248.09 cw(c-1281.79,2210.59) -1255.04,2237.34 ; S7.1@-1286.82,2248.09 cw(c-1281.79,2210.59) -1255.04,2237.34 ; S7.1@-1286.82,2248.09 cw(c-1281.79,2210.59) -1255.04,2237.34 ; S7.1@-1286.82,2248.09 cw(c-1281.79,2210.59) -1255.04,2237.34 ; S7.1@-1282.05,2284.33 cw(c-1343.65,2222.73) -1256.54,2222.73 ; S7.1@-1282.05,2284.33 cw(c-1343.65,2222.73) -1256.54,2222.73 ; S7.1@-1282.05,2284.33 cw(c-1343.65,2222.73) -1256.54,2222.73 ; S7.1@-1282.05,2284.33 cw(c-1343.65,2222.73) -1256.54,2222.73 ; S7.1@-1282.05,2284.33 cw(c-1343.65,2222.73) -1256.54,2222.73 ; S7.1@-1282.05,2284.33 cw(c-1343.65,2222.73) -1256.54,2222.73 ; S7.1@-1273.14,2271.23 ccw(c-1251.47,2265.48) S7.1@-1267.32,2249.63 ; S7.1@-1273.14,2271.23 ccw(c-1251.47,2265.48) S7.1@-1267.32,2249.63 ; S7.1@-1273.14,2271.23 ccw(c-1251.47,2265.48) S7.1@-1267.32,2249.63 ; S7.1@-1273.14,2271.23 ccw(c-1251.47,2265.48) S7.1@-1267.32,2249.63 ; S7.1@-1273.14,2271.23 ccw(c-1251.47,2265.48) S7.1@-1267.32,2249.63 ; S7.1@-1273.14,2271.23 ccw(c-1251.47,2265.48) S7.1@-1267.32,2249.63 ; S7.1@-1273.14,2271.23 ccw(c-1251.47,2265.48) S7.1@-1267.32,2249.63 ; S7.1@-1273.14,2271.23 ccw(c-1251.47,2265.48) S7.1@-1267.32,2249.63 ; S7.1@-1263.47,2268.66 ccw(c-1232.05,2260.33) -1255.04,2237.34 ; S7.1@-1263.47,2268.66 ccw(c-1232.05,2260.33) -1255.04,2237.34 ; S7.1@-1263.47,2268.66 ccw(c-1232.05,2260.33) -1255.04,2237.34 ; S7.1@-1263.47,2268.66 ccw(c-1232.05,2260.33) -1255.04,2237.34 ; S7.1@-1263.47,2268.66 ccw(c-1232.05,2260.33) -1255.04,2237.34 ; S7.1@-1263.47,2268.66 ccw(c-1232.05,2260.33) -1255.04,2237.34 ; S7.1@-1263.47,2268.66 ccw(c-1232.05,2260.33) -1255.04,2237.34 ; S7.1@-1263.47,2268.66 ccw(c-1232.05,2260.33) -1255.04,2237.34 ; -1256.54,2087.84 ccw(c-1215.62,2087.84) -1215.62,2046.93 ; -1256.54,2087.84 -1215.62,2046.93
NetW1_1: ?.1@-2720.54,820.84 M1.1 R10.1 U8.13 | length 6196.2
  TopLayer w10: M1.1@-2647.54,786.84 -2681.54,820.84 ?.1@-2720.54,820.84 ; R10.1@-2647.54,946.84 v2(-2589.54,946.84) ; v2@-2056.54,954.84 -1910.54,954.84 -1805.54,849.84 -1558.54,849.84 -1539.54,868.84 U8.13@-1539.54,908.84 ; ?.1@-2720.54,820.84 cw(c-2720.53,760.73) M1.1@-2671.29,795.21 ; ?.1@-2720.54,820.84 cw(c-2720.53,760.73) M1.1@-2671.29,795.21 ; ?.1@-2720.54,820.84 cw(c-2720.53,760.73) M1.1@-2671.29,795.21 ; ?.1@-2720.54,820.84 cw(c-2720.53,760.73) M1.1@-2671.29,795.21 ; ?.1@-2720.54,820.84 cw(c-2720.53,760.73) M1.1@-2671.29,795.21 ; ?.1@-2720.54,820.84 cw(c-2720.53,760.73) M1.1@-2671.29,795.21 ; ?.1@-2720.54,820.84 cw(c-2720.53,760.73) M1.1@-2671.29,795.21 ; ?.1@-2720.54,820.84 cw(c-2720.53,760.73) M1.1@-2671.29,795.21 ; ?.1@-2720.54,820.84 cw(c-2720.53,760.73) M1.1@-2671.29,795.21 ; ?.1@-2715.59,815.89 cw(c-2703.64,803.94) -2703.64,820.84 ; ?.1@-2715.59,815.89 cw(c-2703.64,803.94) -2703.64,820.84 ; ?.1@-2715.59,815.89 cw(c-2703.64,803.94) -2703.64,820.84 ; ?.1@-2715.59,815.89 cw(c-2703.64,803.94) -2703.64,820.84 ; ?.1@-2715.59,815.89 cw(c-2703.64,803.94) -2703.64,820.84 ; ?.1@-2715.59,815.89 cw(c-2703.64,803.94) -2703.64,820.84 ; ?.1@-2715.59,815.89 cw(c-2703.64,803.94) -2703.64,820.84 ; ?.1@-2715.59,815.89 cw(c-2703.64,803.94) -2703.64,820.84 ; ?.1@-2715.59,815.89 cw(c-2703.64,803.94) -2703.64,820.84 ; ?.1@-2715.59,825.79 ccw(c-2703.64,837.74) -2703.64,820.84 ; ?.1@-2715.59,825.79 ccw(c-2703.64,837.74) -2703.64,820.84 ; ?.1@-2715.59,825.79 ccw(c-2703.64,837.74) -2703.64,820.84 ; ?.1@-2715.59,825.79 ccw(c-2703.64,837.74) -2703.64,820.84 ; ?.1@-2715.59,825.79 ccw(c-2703.64,837.74) -2703.64,820.84 ; ?.1@-2715.59,825.79 ccw(c-2703.64,837.74) -2703.64,820.84 ; ?.1@-2715.59,825.79 ccw(c-2703.64,837.74) -2703.64,820.84 ; ?.1@-2715.59,825.79 ccw(c-2703.64,837.74) -2703.64,820.84 ; ?.1@-2715.59,825.79 ccw(c-2703.64,837.74) -2703.64,820.84 ; -2701.32,820.84 cw(c-2701.32,774.18) M1.1@-2663.1,800.94 ; -2701.32,820.84 cw(c-2701.32,774.18) M1.1@-2663.1,800.94 ; -2701.32,820.84 cw(c-2701.32,774.18) M1.1@-2663.1,800.94 ; -2701.32,820.84 cw(c-2701.32,774.18) M1.1@-2663.1,800.94 ; -2701.32,820.84 cw(c-2701.32,774.18) M1.1@-2663.1,800.94 ; -2701.32,820.84 cw(c-2701.32,774.18) M1.1@-2663.1,800.94 ; -2701.32,820.84 cw(c-2701.32,774.18) M1.1@-2663.1,800.94 ; -2701.32,820.84 cw(c-2701.32,774.18) M1.1@-2663.1,800.94 ; -2701.32,820.84 cw(c-2701.32,774.18) M1.1@-2663.1,800.94 ; -2695.82,820.84 ccw(c-2695.82,860.13) M1.1@-2668.04,832.35 ; -2695.82,820.84 ccw(c-2695.82,860.13) M1.1@-2668.04,832.35 ; -2695.82,820.84 ccw(c-2695.82,860.13) M1.1@-2668.04,832.35 ; -2695.82,820.84 ccw(c-2695.82,860.13) M1.1@-2668.04,832.35 ; -2695.82,820.84 ccw(c-2695.82,860.13) M1.1@-2668.04,832.35 ; -2695.82,820.84 ccw(c-2695.82,860.13) M1.1@-2668.04,832.35 ; -2695.82,820.84 ccw(c-2695.82,860.13) M1.1@-2668.04,832.35 ; -2695.82,820.84 ccw(c-2695.82,860.13) M1.1@-2668.04,832.35 ; -2695.82,820.84 ccw(c-2695.82,860.13) M1.1@-2668.04,832.35 ; -2682.11,820.84 cw(c-2682.11,787.63) M1.1@-2654.91,806.68 ; -2682.11,820.84 cw(c-2682.11,787.63) M1.1@-2654.91,806.68 ; -2682.11,820.84 cw(c-2682.11,787.63) M1.1@-2654.91,806.68 ; -2682.11,820.84 cw(c-2682.11,787.63) M1.1@-2654.91,806.68 ; -2682.11,820.84 cw(c-2682.11,787.63) M1.1@-2654.91,806.68 ; -2682.11,820.84 cw(c-2682.11,787.63) M1.1@-2654.91,806.68 ; -2682.11,820.84 cw(c-2682.11,787.63) M1.1@-2654.91,806.68 ; -2682.11,820.84 cw(c-2682.11,787.63) M1.1@-2654.91,806.68 ; -2682.11,820.84 cw(c-2682.11,787.63) M1.1@-2654.91,806.68 ; M1.1@-2668.04,832.35 ccw(c-2717.55,881.85) -2647.54,881.85 ; M1.1@-2668.04,832.35 ccw(c-2717.55,881.85) -2647.54,881.85 ; M1.1@-2668.04,832.35 ccw(c-2717.55,881.85) -2647.54,881.85 ; M1.1@-2668.04,832.35 ccw(c-2717.55,881.85) -2647.54,881.85 ; M1.1@-2668.04,832.35 ccw(c-2717.55,881.85) -2647.54,881.85 ; M1.1@-2660.97,825.28 ccw(c-2693.41,857.71) -2647.54,857.71 ; M1.1@-2660.97,825.28 ccw(c-2693.41,857.71) -2647.54,857.71 ; M1.1@-2660.97,825.28 ccw(c-2693.41,857.71) -2647.54,857.71 ; M1.1@-2660.97,825.28 ccw(c-2693.41,857.71) -2647.54,857.71 ; M1.1@-2660.97,825.28 ccw(c-2693.41,857.71) -2647.54,857.71 ; R10.1@-2654.61,939.77 cw(c-2671.68,922.7) -2647.54,922.7 ; R10.1@-2654.61,939.77 cw(c-2671.68,922.7) -2647.54,922.7 ; R10.1@-2654.61,939.77 cw(c-2671.68,922.7) -2647.54,922.7 ; R10.1@-2654.61,939.77 cw(c-2671.68,922.7) -2647.54,922.7 ; R10.1@-2654.61,939.77 cw(c-2671.68,922.7) -2647.54,922.7 ; -2647.54,857.71 ccw(c-2601.67,857.71) M1.1@-2634.1,825.28 ; -2647.54,857.71 ccw(c-2601.67,857.71) M1.1@-2634.1,825.28 ; -2647.54,857.71 ccw(c-2601.67,857.71) M1.1@-2634.1,825.28 ; -2647.54,857.71 ccw(c-2601.67,857.71) M1.1@-2634.1,825.28 ; -2647.54,857.71 ccw(c-2601.67,857.71) M1.1@-2634.1,825.28 ; -2647.54,881.85 ccw(c-2577.52,881.85) M1.1@-2627.03,832.35 ; -2647.54,881.85 ccw(c-2577.52,881.85) M1.1@-2627.03,832.35 ; -2647.54,881.85 ccw(c-2577.52,881.85) M1.1@-2627.03,832.35 ; -2647.54,881.85 ccw(c-2577.52,881.85) M1.1@-2627.03,832.35 ; -2647.54,881.85 ccw(c-2577.52,881.85) M1.1@-2627.03,832.35 ; -2647.54,922.7 cw(c-2623.39,922.7) R10.1@-2640.46,939.77 ; -2647.54,922.7 cw(c-2623.39,922.7) R10.1@-2640.46,939.77 ; -2647.54,922.7 cw(c-2623.39,922.7) R10.1@-2640.46,939.77 ; -2647.54,922.7 cw(c-2623.39,922.7) R10.1@-2640.46,939.77 ; -2647.54,922.7 cw(c-2623.39,922.7) R10.1@-2640.46,939.77 ; R10.1@-2640.46,939.77 cw(c-2623.39,922.7) -2623.39,946.84 ; R10.1@-2640.46,939.77 cw(c-2623.39,922.7) -2623.39,946.84 ; R10.1@-2640.46,939.77 cw(c-2623.39,922.7) -2623.39,946.84 ; R10.1@-2640.46,939.77 cw(c-2623.39,922.7) -2623.39,946.84 ; R10.1@-2640.46,939.77 cw(c-2623.39,922.7) -2623.39,946.84 ; R10.1@-2640.46,939.77 cw(c-2623.39,922.7) -2623.39,946.84 ; R10.1@-2640.46,939.77 cw(c-2623.39,922.7) -2623.39,946.84 ; R10.1@-2640.46,939.77 cw(c-2623.39,922.7) -2623.39,946.84 ; R10.1@-2640.46,939.77 cw(c-2623.39,922.7) -2623.39,946.84 ; R10.1@-2640.46,953.91 ccw(c-2623.39,970.98) -2623.39,946.84 ; R10.1@-2640.46,953.91 ccw(c-2623.39,970.98) -2623.39,946.84 ; R10.1@-2640.46,953.91 ccw(c-2623.39,970.98) -2623.39,946.84 ; R10.1@-2640.46,953.91 ccw(c-2623.39,970.98) -2623.39,946.84 ; R10.1@-2640.46,953.91 ccw(c-2623.39,970.98) -2623.39,946.84 ; R10.1@-2640.46,953.91 ccw(c-2623.39,970.98) -2623.39,946.84 ; R10.1@-2640.46,953.91 ccw(c-2623.39,970.98) -2623.39,946.84 ; R10.1@-2640.46,953.91 ccw(c-2623.39,970.98) -2623.39,946.84 ; R10.1@-2640.46,953.91 ccw(c-2623.39,970.98) -2623.39,946.84 ; -2610.73,946.84 cw(c-2610.73,925.65) v2@-2595.74,940.63 ; -2610.73,946.84 ccw(c-2610.73,968.04) v2@-2595.74,953.05 ; -2610.73,946.84 cw(c-2610.73,925.65) v2@-2595.74,940.63 ; -2610.73,946.84 ccw(c-2610.73,968.04) v2@-2595.74,953.05 ; -2610.73,946.84 cw(c-2610.73,925.65) v2@-2595.74,940.63 ; -2610.73,946.84 ccw(c-2610.73,968.04) v2@-2595.74,953.05 ; -2610.73,946.84 cw(c-2610.73,925.65) v2@-2595.74,940.63 ; -2610.73,946.84 ccw(c-2610.73,968.04) v2@-2595.74,953.05 ; -2610.73,946.84 cw(c-2610.73,925.65) v2@-2595.74,940.63 ; -2610.73,946.84 ccw(c-2610.73,968.04) v2@-2595.74,953.05 ; -2610.73,946.84 ccw(c-2610.73,968.04) v2@-2595.74,953.05 ; -2610.73,946.84 cw(c-2610.73,925.65) v2@-2595.74,940.63 ; -2610.73,946.84 ccw(c-2610.73,968.04) v2@-2595.74,953.05 ; -2610.73,946.84 cw(c-2610.73,925.65) v2@-2595.74,940.63 ; -2610.73,946.84 ccw(c-2610.73,968.04) v2@-2595.74,953.05 ; -2610.73,946.84 cw(c-2610.73,925.65) v2@-2595.74,940.63 ; -2610.73,946.84 ccw(c-2610.73,968.04) v2@-2595.74,953.05 ; -2610.73,946.84 cw(c-2610.73,925.65) v2@-2595.74,940.63 ; v2@-2050.33,947.63 cw(c-2032.93,930.23) -2032.93,954.84 ; v2@-2050.33,947.63 cw(c-2032.93,930.23) -2032.93,954.84 ; v2@-2050.33,947.63 cw(c-2032.93,930.23) -2032.93,954.84 ; v2@-2050.33,947.63 cw(c-2032.93,930.23) -2032.93,954.84 ; v2@-2050.33,947.63 cw(c-2032.93,930.23) -2032.93,954.84 ; v2@-2050.33,947.63 cw(c-2032.93,930.23) -2032.93,954.84 ; v2@-2050.33,960.05 ccw(c-2037.75,972.62) -2037.75,954.84 ; v2@-2050.33,960.05 ccw(c-2037.75,972.62) -2037.75,954.84 ; v2@-2050.33,960.05 ccw(c-2037.75,972.62) -2037.75,954.84 ; v2@-2050.33,960.05 ccw(c-2037.75,972.62) -2037.75,954.84 ; v2@-2050.33,960.05 ccw(c-2037.75,972.62) -2037.75,954.84 ; v2@-2050.33,960.05 ccw(c-2037.75,972.62) -2037.75,954.84 ; -1539.54,877.19 cw(c-1529.88,877.19) U8.13@-1536.71,884.01 ; -1539.54,877.19 ccw(c-1549.19,877.19) -1542.36,884.01 cw(c-1549.19,877.19) -1539.54,877.19 ; -1539.54,877.19 cw(c-1529.88,877.19) U8.13@-1536.71,884.01 ; -1539.54,877.19 cw(c-1529.88,877.19) U8.13@-1536.71,884.01 ; -1539.54,877.19 cw(c-1529.88,877.19) U8.13@-1536.71,884.01 ; -1539.54,877.19 cw(c-1529.88,877.19) U8.13@-1536.71,884.01 ; -1539.54,877.19 cw(c-1529.88,877.19) U8.13@-1536.71,884.01
  TopLayer w20: M1.1@-2647.54,786.84 R10.1@-2647.54,946.84 ; M1.1@-2664.51,828.81 ccw(c-2705.48,869.78) -2647.54,869.78 ; M1.1@-2664.51,828.81 ccw(c-2705.48,869.78) -2647.54,869.78 ; M1.1@-2664.51,828.81 ccw(c-2705.48,869.78) -2647.54,869.78 ; M1.1@-2664.51,828.81 ccw(c-2705.48,869.78) -2647.54,869.78 ; -2647.54,869.78 ccw(c-2589.59,869.78) M1.1@-2630.56,828.81 ; -2647.54,869.78 ccw(c-2589.59,869.78) M1.1@-2630.56,828.81 ; -2647.54,869.78 ccw(c-2589.59,869.78) M1.1@-2630.56,828.81 ; -2647.54,869.78 ccw(c-2589.59,869.78) M1.1@-2630.56,828.81
  BottomLayer w10: v2(-2589.54,946.84) -2481.54,946.84 -2406.54,1021.84 -2124.54,1021.84 v2(-2056.54,953.84) ; v2@-2583.33,940.63 cw(c-2568.34,925.65) -2568.34,946.84 ; v2@-2583.33,940.63 cw(c-2568.34,925.65) -2568.34,946.84 ; v2@-2583.33,940.63 cw(c-2568.34,925.65) -2568.34,946.84 ; v2@-2583.33,940.63 cw(c-2568.34,925.65) -2568.34,946.84 ; v2@-2583.33,940.63 cw(c-2568.34,925.65) -2568.34,946.84 ; v2@-2583.33,940.63 cw(c-2568.34,925.65) -2568.34,946.84 ; v2@-2583.33,940.63 cw(c-2568.34,925.65) -2568.34,946.84 ; v2@-2583.33,940.63 cw(c-2568.34,925.65) -2568.34,946.84 ; v2@-2583.33,940.63 cw(c-2568.34,925.65) -2568.34,946.84 ; v2@-2583.33,953.05 ccw(c-2568.34,968.04) -2568.34,946.84 ; v2@-2583.33,953.05 ccw(c-2568.34,968.04) -2568.34,946.84 ; v2@-2583.33,953.05 ccw(c-2568.34,968.04) -2568.34,946.84 ; v2@-2583.33,953.05 ccw(c-2568.34,968.04) -2568.34,946.84 ; v2@-2583.33,953.05 ccw(c-2568.34,968.04) -2568.34,946.84 ; v2@-2583.33,953.05 ccw(c-2568.34,968.04) -2568.34,946.84 ; v2@-2583.33,953.05 ccw(c-2568.34,968.04) -2568.34,946.84 ; v2@-2583.33,953.05 ccw(c-2568.34,968.04) -2568.34,946.84 ; v2@-2583.33,953.05 ccw(c-2568.34,968.04) -2568.34,946.84 ; -2071.52,968.83 cw(c-2086.51,953.84) v2@-2065.31,953.84 ; -2071.52,968.83 ccw(c-2056.54,983.82) v2@-2056.54,962.62 ; -2071.52,968.83 cw(c-2086.51,953.84) v2@-2065.31,953.84 ; -2071.52,968.83 ccw(c-2056.54,983.82) v2@-2056.54,962.62 ; -2071.52,968.83 cw(c-2086.51,953.84) v2@-2065.31,953.84 ; -2071.52,968.83 ccw(c-2056.54,983.82) v2@-2056.54,962.62 ; -2071.52,968.83 cw(c-2086.51,953.84) v2@-2065.31,953.84 ; -2071.52,968.83 ccw(c-2056.54,983.82) v2@-2056.54,962.62 ; -2071.52,968.83 cw(c-2086.51,953.84) v2@-2065.31,953.84 ; -2071.52,968.83 ccw(c-2056.54,983.82) v2@-2056.54,962.62 ; -2071.52,968.83 ccw(c-2056.54,983.82) v2@-2056.54,962.62 ; -2071.52,968.83 cw(c-2086.51,953.84) v2@-2065.31,953.84 ; -2071.52,968.83 ccw(c-2056.54,983.82) v2@-2056.54,962.62 ; -2071.52,968.83 cw(c-2086.51,953.84) v2@-2065.31,953.84 ; -2071.52,968.83 ccw(c-2056.54,983.82) v2@-2056.54,962.62 ; -2071.52,968.83 cw(c-2086.51,953.84) v2@-2065.31,953.84 ; -2071.52,968.83 ccw(c-2056.54,983.82) v2@-2056.54,962.62 ; -2071.52,968.83 cw(c-2086.51,953.84) v2@-2065.31,953.84